# Altium PCB Motor_Driver_Model_D203.PcbDoc (part 2 of 4)
Units mm, origin at the board's own origin, x right, y up, seen from the top; angles counter-clockwise.
Board outline 50 x 35 mm, 4 copper layers (1-SIG-TOP, 2-SIG-GND, 3-SIG-PWR, 4-SIG-BOT), stack 0.96 mm thick; 141 components, 74 nets, 356 pads, 1049 vias.
Unrouted connection lines stored in the file: 1.
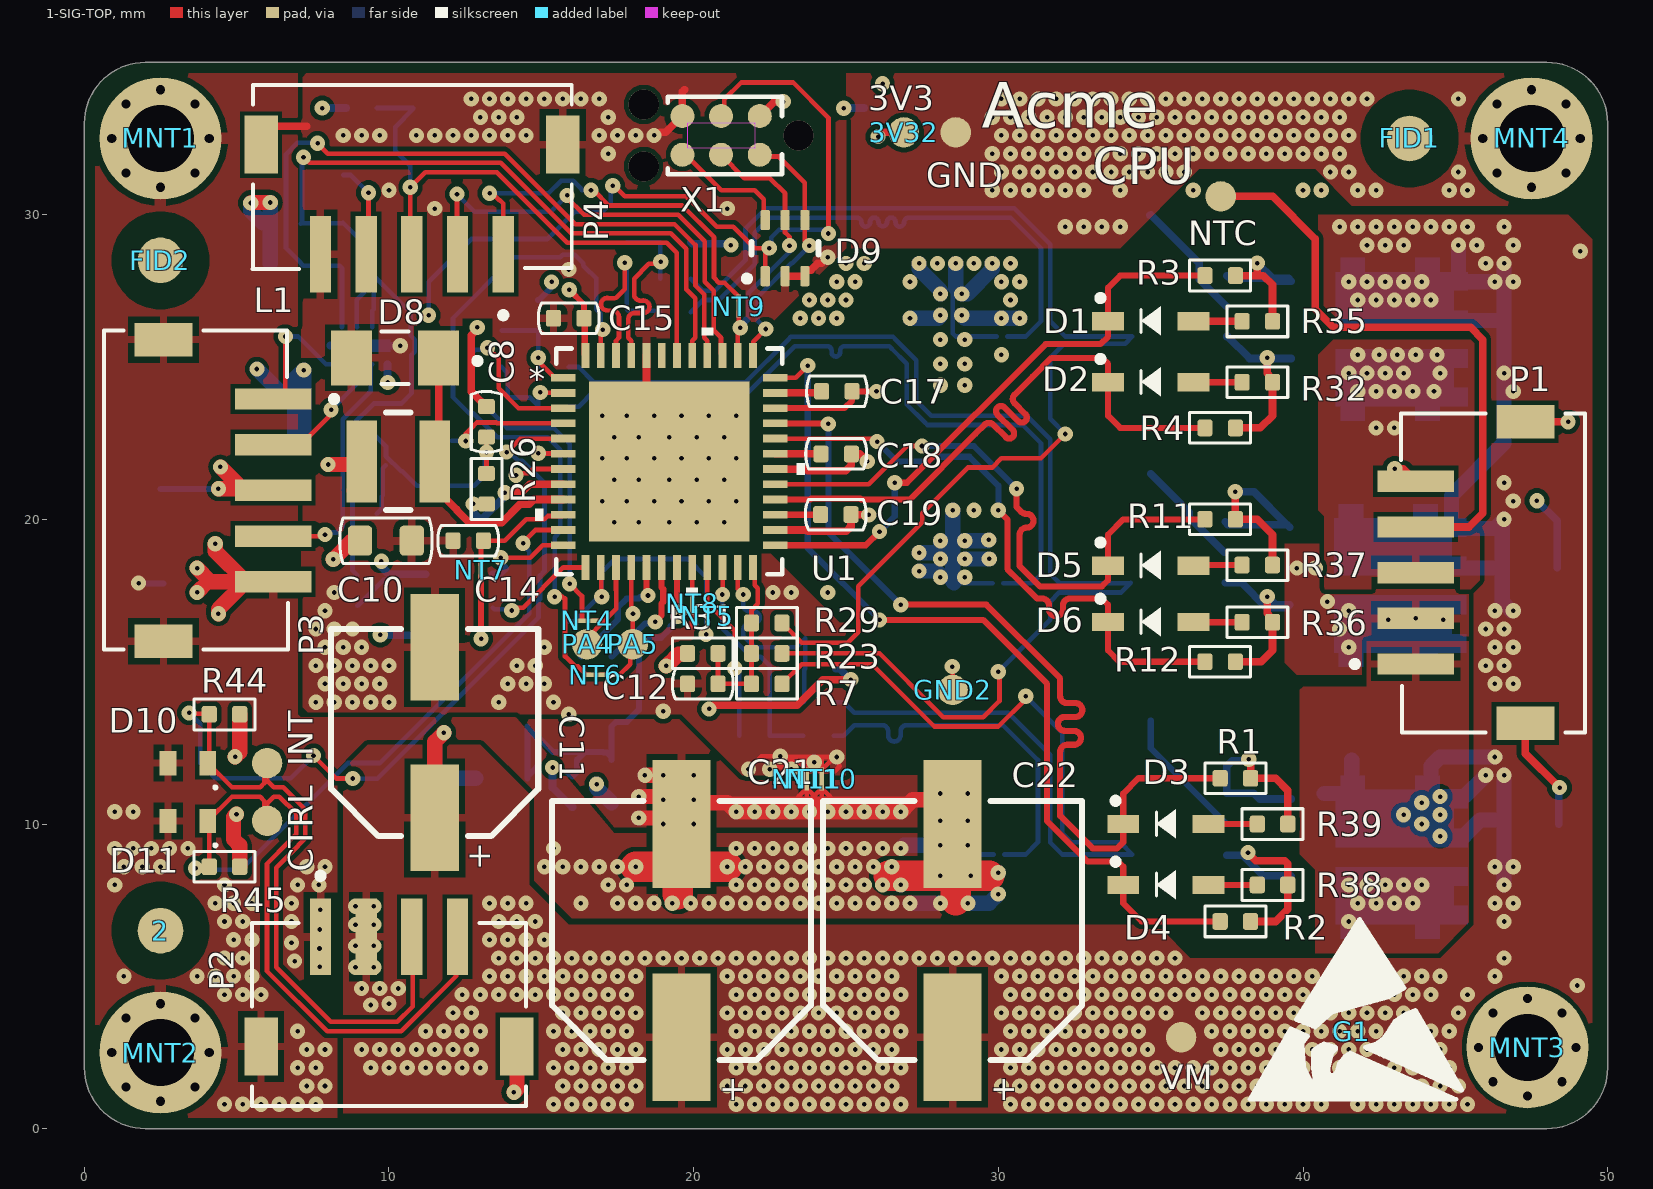
[diagram p0: 1-SIG-TOP view]

## Part data (continued)
P1 P3: library part JST_S5B-ZR-SM4A-TF(LF)(SN), "Connector Header SMD, Right Angle 4 position 0.059\" (1.50mm)", Color=White, Contact Resistance=30mR, Current Rating=1A, Flammability Rating="UL94 V-0", Housing Color=Beige, Insulation Color=Natural, Insulation Resistance=500MR, Manufacturer=JST, Manufacturer Part Number=S5B-ZR-SM4A-TF, Max Operating Temperature=85°C, Max Voltage Rating (AC)=50V, Min Operating Temperature=-25°C, Supplier Part Number 1=7620881P, Body Plating=Tin, ComponentLink4Description=http://www.jst-mfg.com/product/pdf/eng/eZH.pdf?src-supplier=Digi-Key, ComponentLink4URL=https://www.jst-mfg.com/product/pdf/eng/eZH.pdf, Connector Type="Header,Male Pin", Contact Material=Brass,Tin,Copper, Contact Mating Length=0.094inch, Contact Plating=Tin,Copper, Contact Shape=Circular, Depth=6mm, Fastening Type=Detent, Gender=Male, Height=7.2mm, Housing Material=Polyamide, Insulation Material=Nylon, Lead Free="Lead Free", Lead Pitch=1.5mm, Length=7.5mm, Material=Nylon, Max Current Rating=1A, Max Voltage Rating (DC)=50V, Mount="Surface Mount", Number of Contacts=4, Number of Pins=4, Number of Positions=4, Number of Rows=1, Orientation="Right Angle", Packaging=Bulk, Panel Thickness=3.5mm, Pitch=1.5mm, REACH SVHC="No SVHC", Stock 1=0, Supplier 1=RSComponents, Termination=Solder, Voltage Rating=50V, Voltage Rating (AC)=50V, Voltage Rating (DC)=50V, Width=3.5mm
P2: library part JST_S4B-ZR-SM4A-TF(LF)(SN), "Connector Header SMD, Right Angle 4 position 0.059\" (1.50mm)", Color=White, Contact Resistance=30mR, Current Rating=1A, Flammability Rating="UL94 V-0", Housing Color=Beige, Insulation Color=Natural, Insulation Resistance=500MR, Manufacturer=JST, Manufacturer Part Number=S5B-ZR-SM4A-TF, Max Operating Temperature=85°C, Max Voltage Rating (AC)=50V, Min Operating Temperature=-25°C, Supplier Part Number 1=7620881P, Body Plating=Tin, ComponentLink4Description=http://www.jst-mfg.com/product/pdf/eng/eZH.pdf?src-supplier=Digi-Key, ComponentLink4URL=http://www.jst-mfg.com/product/pdf/eng/eZH.pdf?src-supplier=Digi-Key, Connector Type="Header,Male Pin", Contact Material=Brass,Tin,Copper, Contact Mating Length=0.094inch, Contact Plating=Tin,Copper, Contact Shape=Circular, Depth=6mm, Fastening Type=Detent, Gender=Male, Height=7.2mm, Housing Material=Polyamide, Insulation Material=Nylon, Lead Free="Lead Free", Lead Pitch=1.5mm, Length=7.5mm, Material=Nylon, Max Current Rating=1A, Max Voltage Rating (DC)=50V, Mount="Surface Mount", Number of Contacts=4, Number of Pins=4, Number of Positions=4, Number of Rows=1, Orientation="Right Angle", Packaging=Bulk, Panel Thickness=3.5mm, Pitch=1.5mm, REACH SVHC="No SVHC", Stock 1=0, Supplier 1=RSComponents, Termination=Solder, Voltage Rating=50V, Voltage Rating (AC)=50V, Voltage Rating (DC)=50V, Width=3.5mm
P4: library part JST_S5B-ZR-SM4A-TF(LF)(SN), "Connector Header SMD, Right Angle 4 position 0.059\" (1.50mm)", Color=White, Contact Resistance=30mR, Current Rating=1A, Flammability Rating="UL94 V-0", Housing Color=Beige, Insulation Color=Natural, Insulation Resistance=500MR, Manufacturer=JST, Manufacturer Part Number=S4B-ZR-SM4A-TF, Max Operating Temperature=85°C, Max Voltage Rating (AC)=50V, Min Operating Temperature=-25°C, Supplier Part Number 1=1830923, Body Plating=Tin, ComponentLink1Description=Datasheet, ComponentLink1URL=https://www.jst-mfg.com/product/pdf/eng/eZH.pdf, Connector Type="Header,Male Pin", Contact Material=Brass,Tin,Copper, Contact Mating Length=0.094inch, Contact Plating=Tin,Copper, Contact Shape=Circular, Depth=6mm, Fastening Type=Detent, Gender=Male, Height=7.2mm, Housing Material=Polyamide, Insulation Material=Nylon, Lead Free="Lead Free", Lead Pitch=1.5mm, Length=7.5mm, Material=Nylon, Max Current Rating=1A, Max Voltage Rating (DC)=50V, Mount="Surface Mount", Number of Contacts=4, Number of Pins=4, Number of Positions=4, Number of Rows=1, Orientation="Right Angle", Packaging=Bulk, Panel Thickness=3.5mm, Pitch=1.5mm, REACH SVHC="No SVHC", Stock 1=0, Supplier 1=Farnell, Termination=Solder, Voltage Rating=50V, Voltage Rating (AC)=50V, Voltage Rating (DC)=50V, Width=3.5mm
Q1 Q2 Q3: library part "ARRAY MOSFET 2N-CH 60V 33A POWERFLAT", "Mosfet Array 2 N-Channel (Dual) 60V 33A 58W Surface Mount SOT-563", Case/Package=POWERFLAT-5x6, Continuous Drain Current (ID)=33A, Drain to Source Breakdown Voltage=60V, Drain to Source Resistance="27 mR", Gate to Source Voltage (Vgs)=20V, Input Capacitance=420pF, Manufacturer=STMicroelectronics, Max Operating Temperature=175°C, Max Power Dissipation=58W, Min Operating Temperature=-55°C, Package Quantity=3000, Supplier Part Number 1=497-17308-1-ND, ClassName=TCPP, ComponentLink1Description=https://www.st.com/content/ccc/resource/technical/document/datasheet/group0/f7/13/0c/9e/7a/b2/47/d9/DM00224009/files/DM00224009.pdf/jcr:content/translations/en.DM00224009.pdf, ComponentLink1URL=https://www.st.com/content/ccc/resource/technical/document/datasheet/group0/f7/13/0c/9e/7a/b2/47/d9/DM00224009/files/DM00224009.pdf/jcr:content/translations/en.DM00224009.pdf, Drain to Source Voltage (Vdss)=60V, Element Configuration=Dual, FET Type="2 N-Channel", Height=1mm, Length=6.35mm, Manufacturer Part Number=STL36DN6F7, Mount="Surface Mount", Number of Channels=2, Packaging="Tape and Reel", Polarity=N-CHANNEL, Pricing 1="1=0.39, 10=0.338, 25=0.3152, 100=0.234, 500=0.1827, 1000=0.1485 (USD)", Radiation Hardening=No, Rds On Max="27 mR", REACH SVHC="No SVHC", Series=-, Stock 1=141366, Supplier 1=Digi-Key, Width=5.40mm
R1 R2 R3 R4 R11 R12: "62 Ohms ±1% 0.1W, 1/10W Chip Resistor 0402 (1005 Metric) Moisture Resistant Thick Film", Case Code (Imperial)=0402, Case Code (Metric)=1005, Manufacturer="Panasonic Electronic Components", Manufacturer Part Number=ERJ-U02F62R0X, Max Operating Temperature=155°C, Max Power Dissipation=100mW, Min Operating Temperature=-55°C, Resistance=62R, Supplier Part Number 1=10-ERJ-U02F62R0XCT-ND, Temperature Coefficient=200ppm/°C, Tolerance=1%, Voltage Rating=50V, Case/Package=0402, ComponentLink1Description=https://industrial.panasonic.com/cdbs/www-data/pdf/RDP0000/AOA0000C334.pdf, ComponentLink1URL=https://industrial.panasonic.com/cdbs/www-data/pdf/RDP0000/AOA0000C334.pdf, Composition="Thick Film", Contact Plating=Tin,Matte, Depth=0.5mm, Features="Moisture Resistant", Height=0.016inch, Lead Free="Lead Free", Length=1mm, Military Standard=Not, Mount="Surface Mount", Number of Terminations=2, Packaging="Tape and Reel", Power Rating=100mW, Pricing 1="1=0.1, 10=0.015, 100=0.0062, 1000=0.0028, 2500=0.0024, 5000=0.002 (USD)", Stock 1=453897, Supplier 1=Digi-Key, Termination=SMD/SMT, Width=0.02inch
R5 R6 R8 R13 R14 R16: library part "RES SMD 1K OHM 1% 1/16W 0402", "1.78 kOhms ±1% 0.1W, 1/10W Chip Resistor 0402 (1005 Metric) Moisture Resistant Thick Film", Case Code (Imperial)=0402, Case Code (Metric)=1005, Manufacturer=Yageo, Manufacturer Part Number=RT0402FRE071K78L, Max Operating Temperature=155°C, Min Operating Temperature=-55°C, Power Rating=100mW, Resistance=1.78kR, Supplier Part Number 1=603-RT0402FRE071K78L, Temperature Coefficient=100ppm/°C, Tolerance=1%, Voltage Rating=50V, Case/Package=0402, Composition="Thick Film", Datasheet=https://www.mouser.com/datasheet/2/447/PYu_RT_1_to_0_01_RoHS_L_11-1669912.pdf, Depth=0.5mm, Height=0.32mm, Lead Free="Lead Free", Length=1mm, Military Standard=Not, Mount="Surface Mount", Number of Pins=2, Packaging="Tape and Reel", Pricing 1="1=0.1, 10=0.015, 100=0.0062, 1000=0.0028, 2500=0.0024, 5000=0.002 (USD)", REACH SVHC=Unknown, Stock 1=9574509, Supplier 1=Mouser, Termination=SMD/SMT, Voltage Rating (DC)=50V, Width=0.5mm
R7 R23 R29: library part "RES SMD 2.2 OHM 1% 1/16W 0402", "2.2 kOhms ±1% 0.100W, 1/10W Chip Resistor 0402 (1005 Metric) Moisture Resistant Thick Film", Case Code (Imperial)=0402, Case Code (Metric)=1005, Manufacturer="Panasonic Electronic Components", Manufacturer Part Number=ERJ-2RKF2201X, Max Operating Temperature=155°C, Min Operating Temperature=-55°C, Power Rating=100mW, Resistance=2.2kR, Supplier Part Number 1=P2.20KLCT-ND, Temperature Coefficient=200ppm/°C, Tolerance=1%, Voltage Rating=50V, Case/Package=0402, Composition="Thick Film", Datasheet=https://industrial.panasonic.com/cdbs/www-data/pdf/RDA0000/AOA0000C304.pdf, Depth=0.5mm, Height=0.32mm, Lead Free="Lead Free", Length=1mm, Mount="Surface Mount", Number of Pins=2, Packaging="Tape and Reel", Pricing 1="1=0.1, 10=0.023, 100=0.0093, 1000=0.0042, 2500=0.0036, 5000=0.003 (USD)", REACH SVHC="No SVHC", Stock 1=552576, Supplier 1=Digi-Key, Termination=SMD/SMT, Voltage Rating (DC)=50V, Width=0.5mm
R9 R10 R15: "0.04 Ohms ±1% 2W Chip Resistor 2512 (6432 Metric)", Case Code (Imperial)=2512, Case Code (Metric)=6432, Manufacturer="Stackpole Electronics Inc", Manufacturer Part Number=CSRN2512FK40L0, Max Operating Temperature=155°C, Max Power Dissipation=2W, Min Operating Temperature=-55°C, Package Quantity=2000, Resistance=0.04R, Supplier Part Number 1=CSRN2512FK40L0CT-ND, Temperature Coefficient=200ppm/°C, Tolerance=1%, Voltage Rating=200V, Case/Package=2512, ComponentLink1Description=https://www.digikey.in/product-detail/en/stackpole-electronics-inc/CSRN2512FK40L0/CSRN2512FK40L0TR-ND/1788108, ComponentLink1URL=https://www.seielect.com/catalog/sei-csr_csrn.pdf, Composition="Thick Film", Contact Plating=Tin, Depth=3.15mm, Height=0.6mm, Lead Free="Lead Free", Length=6.3mm, Military Standard=Not, Mount="Surface Mount", Number of Pins=2, Number of Terminals=2, Number of Terminations=2, Packaging="Tape and Reel", Power Rating=2W, Pricing 1="1=0.34, 10=0.292, 100=0.114, 1000=0.0477 (USD)", Radiation Hardening=No, REACH SVHC=Unknown, Stock 1=19521, Supplier 1=Digi-Key, Termination=SMD/SMT, Voltage Rating (DC)=200V, Weight=0.001429oz, Width=3.15mm
R17 R20 R21 R22 R24 R25: library part "RES SMD 1K OHM 1% 1/16W 0402", "27.4 kOhms ±1% 0.100W, 1/10W Chip Resistor 0402 (1005 Metric) Moisture Resistant Thick Film", Case Code (Imperial)=0402, Case Code (Metric)=1005, Manufacturer="Panasonic Electronic Components", Manufacturer Part Number=ERJ-2RKF2742X, Max Operating Temperature=155°C, Min Operating Temperature=-55°C, Power Rating=100mW, Resistance=27.4kR, Supplier Part Number 1=P27.4KLCT-ND, Temperature Coefficient=100ppm/°C, Tolerance=1%, Voltage Rating=50V, Case/Package=0402, Composition="Thick Film", Datasheet=https://industrial.panasonic.com/cdbs/www-data/pdf/RDA0000/AOA0000C304.pdf, Depth=0.5mm, Height=0.32mm, Lead Free="Lead Free", Length=1mm, Military Standard=Not, Mount="Surface Mount", Number of Pins=2, Packaging="Tape and Reel", Pricing 1="1=0.1, 10=0.015, 100=0.0062, 1000=0.0028, 2500=0.0024, 5000=0.002 (USD)", REACH SVHC=Unknown, Stock 1=9574509, Supplier 1=Digi-Key, Termination=SMD/SMT, Voltage Rating (DC)=50V, Width=0.5mm
R18 R19: "4.75 kOhms ±1% 0.063W, 1/16W Chip Resistor 0402 (1005 Metric) Moisture Resistant Thick Film", Case Code (Imperial)=0402, Case Code (Metric)=1005, Manufacturer=Yageo, Manufacturer Part Number=RC0402FR-074K75P, Max Operating Temperature=155°C, Max Power Dissipation=63mW, Min Operating Temperature=-55°C, Resistance=*DNP*, Supplier Part Number 1=YAG1271CT-ND, Temperature Coefficient=150ppm/°C, Tolerance=1%, Case/Package=0402, ClassName=I2C_SW, ComponentLink1Description=http://www.yageo.com/NewPortal/yageodocoutput?fileName=/pdf/R-Chip/PYu-RC_51_RoHS_P_0.pdf&src-supplier=Digi-Key, ComponentLink1URL=http://www.yageo.com/NewPortal/yageodocoutput?fileName=/pdf/R-Chip/PYu-RC_51_RoHS_P_0.pdf&src-supplier=Digi-Key, ComponentLink2Description=http://www.yageo.com.tw/exep/pages/download/literatures/PYu-R_INT-thick_7.pdf?src-supplier=Digi-Key, ComponentLink2URL=http://www.yageo.com.tw/exep/pages/download/literatures/PYu-R_INT-thick_7.pdf?src-supplier=Digi-Key, Composition="Thick Film", Features="Moisture Resistant", Height=0.016inch, Length=0.039inch, Mount="Surface Mount", Number of Terminations=2, Packaging="Tape and Reel", Pricing 1="1=0.1, 10=0.035, 100=0.014, 1000=0.0063, 2500=0.0055, 5000=0.0045 (USD)", Stock 1=23485, Supplier 1=Digi-Key, Width=0.02inch